# Altium PCB PCB1.PcbDoc (part 8 of 9)
Units mm, origin at the board's own origin, x right, y up, seen from the top; angles counter-clockwise.
Board outline 227 x 102 mm, 4 copper layers (Top Layer, MidLayer1, MidLayer2, Bottom Layer); 425 components, 426 nets, 1455 pads, 440 vias.
Unrouted connection lines stored in the file: 2.
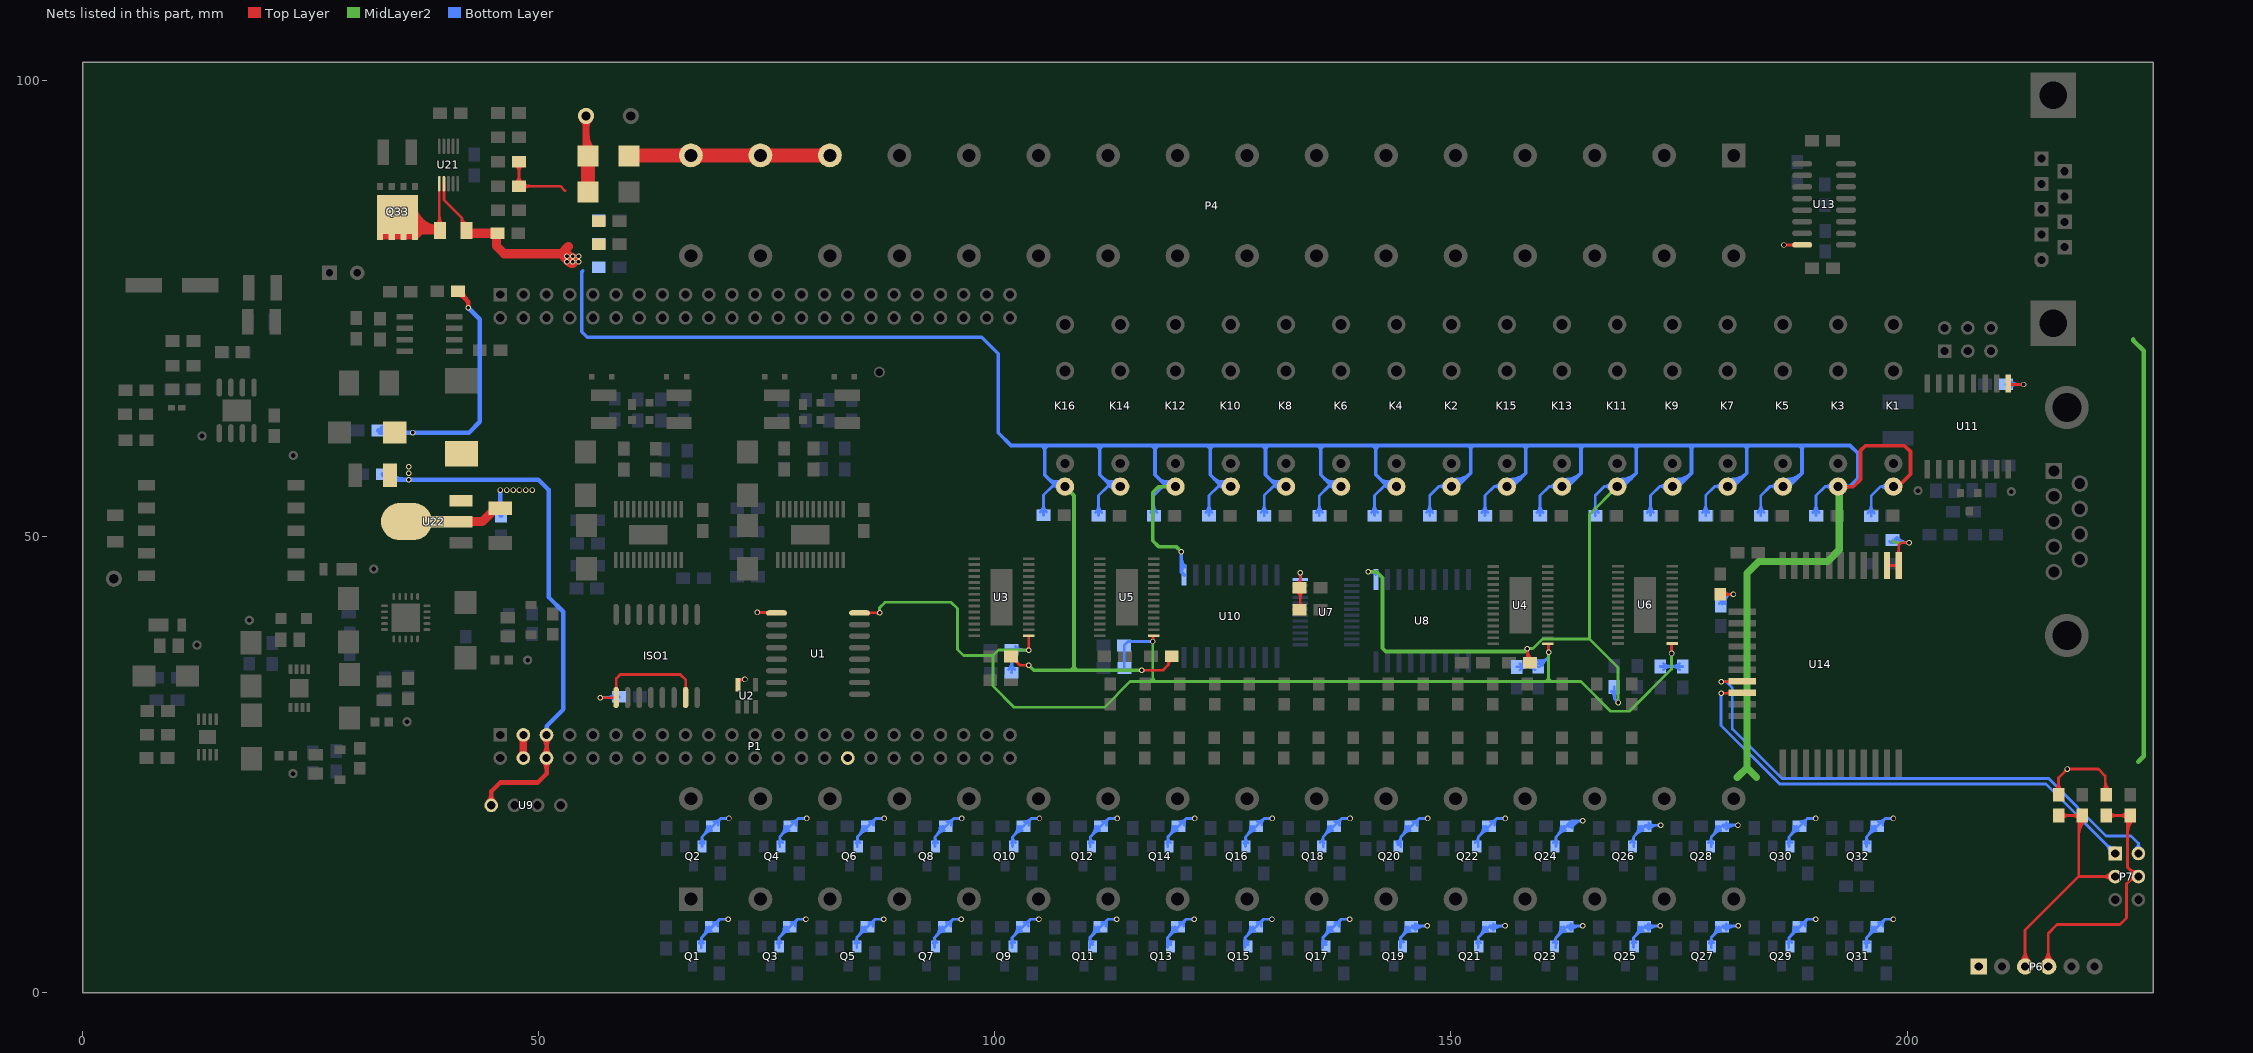
[diagram p10: the nets of this part, all layers, seen from the top]

## Via types
v1: diameter 0.6, hole 0.4, Top Layer to Bottom Layer, 427 vias
v2: diameter 0.5, hole 0.2, Top Layer to Bottom Layer, 9 vias
v3: diameter 0.66, hole 0.33, Top Layer to Bottom Layer, 4 vias

## Nets (pads, with @x,y where several pads share a name; then routed paths per layer and width w, separated by ;. In a path a pad name is that pad's centre, name@x,y a point inside that pad or via, vN(x,y) a via of type N, cw(c..) or ccw(c..) an arc to the next point about the centre after c; other vN are vias at no path point) (continued)
UART_RXD: C28.2 P6.3 P7.3 R126.2 | length 40.9
  Top Layer w0.3: P6.3@212.407,3.423 ccw(c211.146,4.684) 212.93,4.684 ccw(c214.714,4.684) P6.3@213.453,3.423 ; P6.3@212.62,3.21 ccw(c211.87,3.96) 212.93,3.96 ccw(c213.99,3.96) P6.3@213.24,3.21 ; P6.3@212.93,2.9 212.93,6.89 218.8,12.76 ; R126.2@216.6,19.444 C28.2@219.217,19.444 ; R126.2@216.943,19.101 cw(c217.771,18.273) 217.771,19.444 cw(c217.771,20.615) R126.2@216.943,19.787 ; 218.8,17.14 cw(c221.393,17.14) C28.2@219.56,18.974 ; 218.8,17.864 cw(c220.669,17.864) C28.2@219.347,19.186 ; 218.8,18.589 cw(c219.945,18.589) C28.2@219.135,19.398 ; C28.2@218.874,19.101 ccw(c218.046,18.273) 218.046,19.444 ccw(c218.046,20.615) C28.2@218.874,19.787 ; C28.2@219.15,19.75 218.8,19.4 218.8,12.76 ; P7.3@222.386,12.336 ccw(c221.361,11.311) 221.361,12.76 ccw(c221.361,14.209) P7.3@222.386,13.184 ; P7.3@222.81,12.76 218.8,12.76
UART_RXD1: P7.1 U14.19 | length 59.3
  Top Layer w0.3: v1(179.61,32.86) 182.2,32.86 U14.19@182.23,32.89 ; v1@179.716,32.754 cw(c179.972,32.498) 179.972,32.86 cw(c179.972,33.222) v1@179.716,32.966 ; 180.199,32.86 ccw(c180.199,33.486) U14.19@180.642,33.043 ; 180.402,32.86 cw(c180.402,32.521) U14.19@180.642,32.761
  Bottom Layer w0.3: v1@179.504,32.754 cw(c179.248,32.498) 179.61,32.498 cw(c179.972,32.498) v1@179.716,32.754 ; v1(179.61,32.86) 179.61,29.33 186.04,22.9 215.21,22.9 P7.1@222.81,15.3 ; P7.1@222.21,15.3 ccw(c220.761,15.3) 221.786,16.324 ccw(c222.81,17.349) P7.1@222.81,15.9
UART_TXD: C27.2 P6.4 P7.4 R125.2 | length 43.8
  Top Layer w0.3: P6.4@214.947,3.423 ccw(c213.686,4.684) 215.47,4.684 ccw(c217.254,4.684) P6.4@215.993,3.423 ; P6.4@215.16,3.21 ccw(c214.41,3.96) 215.47,3.96 ccw(c216.53,3.96) P6.4@215.78,3.21 ; P6.4@215.47,2.9 215.47,6.54 216.45,7.52 223.34,7.52 224.05,8.23 224.05,11.98 224.83,12.76 P7.4@225.35,12.76 ccw(c225.195,11.927) 224.596,12.526 ; R125.2@221.833,19.444 C27.2@224.45,19.444 224.15,19.144 224.15,13.77 P7.4@225.16,12.76 ; R125.2@222.176,19.101 cw(c223.004,18.273) 223.004,19.444 cw(c223.004,20.615) R125.2@222.176,19.787 ; C27.2@224.107,19.101 ccw(c223.279,18.273) 223.279,19.444 ccw(c223.279,20.615) C27.2@224.107,19.787 ; 224.15,17.422 cw(c226.345,17.422) C27.2@224.793,18.974 ; 224.15,18.146 cw(c225.621,18.146) C27.2@224.581,19.186 ; 224.193,12.123 cw(c225.069,11.247) P7.4@225.295,12.465 ; 224.245,13.675 ccw(c225.063,14.493) P7.4@225.252,13.352 ; 224.46,13.46 cw(c223.76,12.76) P7.4@224.75,12.76 ; 224.658,13.262 ccw(c225.18,13.785) P7.4@225.301,13.056
UART_TXD1: P7.2 U14.18 | length 62.5
  Top Layer w0.3: v1(179.61,34.13) 181.891,34.13 U14.18@181.933,34.172 ; v1@179.716,34.024 cw(c179.972,33.768) 179.972,34.13 cw(c179.972,34.492) v1@179.716,34.236 ; 180.199,34.13 ccw(c180.199,34.756) U14.18@180.642,34.313 ; 180.402,34.13 cw(c180.402,33.791) U14.18@180.642,34.031
  Bottom Layer w0.3: v1(179.61,34.13) 180.16,34.13 180.84,33.45 180.84,28.95 186.29,23.5 215.52,23.5 221.81,17.21 224.54,17.21 225.35,16.4 ; v1@179.716,34.024 cw(c179.972,33.768) 179.972,34.13 cw(c179.972,34.492) v1@179.716,34.236 ; P7.2@225.025,15.804 ccw(c224.642,16.4) 225.35,16.4 ; P7.2@225.35,15.3 225.35,16.4 ; P7.2@225.675,15.804 cw(c226.058,16.4) 225.35,16.4
V3_3D: C14.2 C15.2 C16.1 C48.1 C95.1 CA1.1 D51.1 ISO1.1 ISO1.7 P6.1 R124.2 R125.1 R126.1 R127.2 U1.1 U2.5 U7.24 U11.1 U13.16 U14.1 U14.2 U22.2 | length 141.8
  Top Layer w0.3: v1(56.75,32.36) 58.455,32.36 58.51,32.415 58.51,34.49 58.94,34.92 65.52,34.92 66.13,34.31 66.13,32.17 ISO1.7@66.21,32.09 ; v1@56.856,32.254 cw(c57.112,31.998) 57.112,32.36 cw(c57.112,32.722) v1@56.856,32.466 ; 58.05,32.36 ccw(c58.05,32.825) ISO1.1@58.379,32.496 ; ISO1.1@58.379,33.346 ccw(c58.063,33.662) 58.51,33.662 ; 58.51,33.542 ccw(c58.787,33.542) ISO1.1@58.591,33.346 ; ISO1.7@65.999,33.346 ccw(c65.683,33.662) 66.13,33.662 ; 66.13,33.542 ccw(c66.407,33.542) ISO1.7@66.211,33.346 ; U2.5@71.77,34.13 72.01,34.37 v1(72.61,34.37) ; U2.5@71.941,34.13 cw(c72.522,33.549) v1@72.522,34.37 ; v1@72.504,34.264 ccw(c72.248,34.008) 72.248,34.37 ccw(c72.248,34.732) v1@72.504,34.476 ; v1(73.97,41.71) 76.015,41.71 U1.1@76.07,41.655 ; v1@74.076,41.604 cw(c74.332,41.348) 74.332,41.71 cw(c74.332,42.072) v1@74.076,41.816 ; 74.725,41.71 cw(c74.725,41.16) U1.1@75.114,41.549 ; C14.2@133.127,44.067 cw(c132.275,43.215) 133.48,43.215 ; C14.2@133.127,44.753 ccw(c132.275,45.605) 133.48,45.605 ; v1@133.374,45.974 cw(c133.118,45.718) 133.48,45.718 cw(c133.842,45.718) v1@133.586,45.974 ; C15.2@133.414,42.02 133.48,42.086 v1(133.48,46.08) ; 133.48,43.263 cw(c134.617,43.263) C14.2@133.813,44.067 ; D51.1@179.517,43.717 179.534,43.7 v1(180.96,43.7) ; D51.1@179.86,43.374 cw(c180.647,42.587) 180.647,43.7 ; D51.1@179.86,44.06 ccw(c180.728,44.928) v1@180.728,43.7 ; v1@180.854,43.594 ccw(c180.598,43.338) 180.598,43.7 ccw(c180.598,44.062) v1@180.854,43.806 ; v1(186.5,81.99) 188.487,81.99 U13.16@188.5,82.003 ; v1@186.606,81.884 cw(c186.862,81.628) 186.862,81.99 cw(c186.862,82.352) v1@186.606,82.096 ; 187.306,81.99 ccw(c187.306,82.396) U13.16@187.594,82.109 ; 187.369,81.99 cw(c187.369,81.672) U13.16@187.594,81.897 ; U14.2@197.8,46.864 U14.1@199.07,46.864 199.07,49.06 199.37,49.36 v1(200.21,49.36) ; U14.2@197.941,46.723 cw(c198.283,46.381) 198.283,46.864 cw(c198.283,47.347) U14.2@197.941,47.005 ; U14.1@198.929,46.723 ccw(c198.587,46.381) 198.587,46.864 ccw(c198.587,47.347) U14.1@198.929,47.005 ; U14.1@198.929,48.155 ccw(c198.587,48.497) 199.07,48.497 ccw(c199.553,48.497) U14.1@199.211,48.155 ; v1@200.104,49.254 ccw(c199.848,48.998) 199.848,49.36 ccw(c199.848,49.722) v1@200.104,49.466 ; U11.1@211.085,66.81 211.195,66.7 v1(212.76,66.7) ; U11.1@211.191,66.916 ccw(c211.713,67.438) 211.713,66.7 ; v1@212.654,66.594 ccw(c212.398,66.338) 212.398,66.7 ccw(c212.398,67.062) v1@212.654,66.806 ; R126.1@216.257,22.2 ccw(c215.429,23.028) 216.6,23.028 ccw(c217.771,23.028) R126.1@216.943,22.2 ; R126.1@216.6,21.73 216.6,23.58 v1(217.57,24.55) 220.96,24.55 221.71,23.8 221.71,21.853 R125.1@221.833,21.73 ; v1@217.42,24.55 cw(c217.058,24.55) 217.314,24.294 cw(c217.57,24.038) v1@217.57,24.4 ; v1@217.676,24.444 cw(c217.932,24.188) 217.932,24.55 cw(c217.932,24.912) v1@217.676,24.656 ; R125.1@221.49,22.2 ccw(c220.96,22.73) 221.71,22.73 ; 221.71,22.601 ccw(c222.578,22.601) R125.1@221.964,21.988 ; 221.71,23.326 ccw(c223.302,23.326) R125.1@222.176,22.2
  Top Layer w0.5: CA1.1@45.785,53.135 CA1.1@45.8,53.15
  Top Layer w1: U22.2@40.214,51.67 43.8,51.67 CA1.1@45.5,53.37
  MidLayer2 w0.3: 198.399,49.568 198.607,49.36 v1(200.21,49.36)
  MidLayer2 w0.5: 224.783,71.63 224.783,71.522 225.918,70.387 225.918,25.936 225.319,25.337
  Bottom Layer w0.3: v1(56.75,32.36) 58.73,32.36 C48.1@58.82,32.45 ; v1@56.856,32.254 cw(c57.112,31.998) 57.112,32.36 cw(c57.112,32.722) v1@56.856,32.466 ; 57.305,32.36 ccw(c57.305,33.838) C48.1@58.35,32.793 ; 57.739,32.36 cw(c57.739,31.496) C48.1@58.35,32.107 ; 58.029,32.36 ccw(c58.029,33.114) C48.1@58.562,32.581 ; v1@133.374,45.974 cw(c133.118,45.718) 133.48,45.718 cw(c133.842,45.718) v1@133.586,45.974 ; U7.24@133.48,45.326 v1(133.48,46.08) ; R127.2@179.42,42.69 180.43,43.7 ; R127.2@179.55,43.108 ccw(c179.55,43.803) 180.042,43.312 ; R127.2@179.735,42.635 cw(c180.507,42.683) R127.2@179.96,43.23 ; R127.2@180.034,42.653 cw(c181.392,42.738) 180.43,43.7 ; v1@180.854,43.594 ccw(c180.598,43.338) 180.598,43.7 ccw(c180.598,44.062) v1@180.854,43.806 ; v1(180.96,43.7) 180.43,43.7 ; R124.2@198.08,49.49 198.21,49.36 v1(200.21,49.36) cw(c200.21,51.12) R124.2@198.88,49.968 ; R124.2@198.653,49.771 ccw(c199.553,50.551) 199.553,49.36 ; v1@200.104,49.254 ccw(c199.848,48.998) 199.848,49.36 ccw(c199.848,49.722) v1@200.104,49.466 ; C16.1@210.84,66.74 210.88,66.7 v1(212.76,66.7) ; C16.1@211.31,66.397 cw(c212.041,65.666) 212.041,66.7 ; C16.1@211.31,67.083 ccw(c212.234,68.007) 212.234,66.7 ; v1@212.654,66.594 ccw(c212.398,66.338) 212.398,66.7 ccw(c212.398,67.062) v1@212.654,66.806
  Bottom Layer w0.5: C95.1@45.598,52.729 ccw(c45.11,53.217) 45.8,53.217 ; 45.8,53.555 ccw(c46.968,53.555) C95.1@46.142,52.729 ; v1@45.8,55.12 45.8,52.4 C95.1@45.87,52.33
  other v1: 45.8,55.13 46.498,55.13 47.196,55.13 47.894,55.13 48.592,55.13 49.29,55.13
V5_0VOP: C6.2 C7.2 C8.2 C9.2 C10.2 C11.2 C12.2 C13.2 U1.16 U3.15 U4.15 U5.15 U6.15 | length 161.5
  Top Layer w0.3: U1.16@85.17,41.655 85.185,41.67 v1(87.37,41.67) ; U1.16@86.126,41.549 cw(c86.418,41.257) 86.418,41.67 ; U1.16@86.126,41.761 ccw(c86.346,41.981) 86.346,41.67 ; v1@87.264,41.564 ccw(c87.008,41.308) 87.008,41.67 ccw(c87.008,42.032) v1@87.264,41.776 ; v1@103.604,37.686 ccw(c103.348,37.942) 103.71,37.942 ccw(c104.072,37.942) v1@103.816,37.686 ; U3.15@103.702,39.155 103.71,39.147 v1(103.71,37.58) ; v1@117.214,38.636 ccw(c116.958,38.892) 117.32,38.892 ccw(c117.682,38.892) v1@117.426,38.636 ; v1(117.32,38.53) U5.15@117.32,39.033 ; 117.32,38.855 cw(c117.742,38.855) U5.15@117.443,39.153 ; v1(160.7,37.35) U4.15@160.7,38.133 ; v1@174.074,37.326 ccw(c173.818,37.582) 174.18,37.582 ccw(c174.542,37.582) v1@174.286,37.326 ; v1(174.18,37.22) 174.18,38.243 U6.15@174.252,38.315 ; 174.18,38.136 cw(c174.431,38.136) U6.15@174.252,38.315
  MidLayer2 w0.3: v1(87.37,41.67) 87.37,42.226 87.969,42.825 95.224,42.825 95.911,42.138 95.911,37.672 96.579,37.004 99.806,37.004 ; v1(103.71,37.58) 103.703,37.587 100.389,37.587 99.806,37.004 ; 117,34.157 117.317,34.474 ; v1@117.317,38.527 117.317,34.474 ; 117.634,34.157 117.317,34.474 ; 160.36,34.14 160.7,34.48 ; v1(160.7,37.35) 160.7,34.48 ; 161.04,34.14 160.7,34.48 ; v1(174.18,37.22) 174.18,35.493 169.573,30.886 167.502,30.886 164.248,34.14 114.839,34.14 112.012,31.313 102.131,31.313 99.806,33.638 99.806,37.004
  Bottom Layer w0.3: C7.2@101.463,37.287 cw(c100.514,36.338) 101.856,36.338 ; C6.2@101.493,35.463 ccw(c100.617,36.339) 101.856,36.339 ; C7.2@101.806,37.63 C7.2@101.856,37.58 ; C6.2@101.836,35.12 101.856,35.14 C7.2@101.856,37.58 ; 101.856,36.243 ccw(c102.959,36.243) C6.2@102.179,35.463 ; 101.856,36.58 cw(c102.856,36.58) C7.2@102.149,37.287 ; C7.2@102.276,37.287 cw(c102.983,36.58) 102.983,37.58 ; C7.2@102.276,37.973 ccw(c103.225,38.922) 103.225,37.58 ; v1@103.604,37.474 ccw(c103.348,37.218) 103.348,37.58 ccw(c103.348,37.942) v1@103.604,37.686 ; v1(103.71,37.58) C7.2@101.856,37.58 ; C10.2@114.21,35.62 114.18,35.65 C11.2@114.18,38.09 114.62,38.53 v1(117.32,38.53) ; C8.2@157.227,35.753 159.667,35.753 160.7,36.786 ; C8.2@157.57,35.41 cw(c158.398,34.582) 158.398,35.753 cw(c158.398,36.924) C8.2@157.57,36.096 ; 158.323,35.753 ccw(c158.323,37.003) C9.2@159.207,36.119 ; 158.435,35.753 cw(c158.435,34.661) C9.2@159.207,35.433 ; C9.2@159.567,36.087 ccw(c159.645,36.936) 160.247,36.333 ; C9.2@159.594,36.386 ccw(c159.72,37.766) 160.7,36.786 ; C9.2@160.035,35.903 cw(c160.561,35.903) 160.189,36.275 ; v1@160.594,37.244 cw(c160.338,36.988) 160.7,36.988 cw(c161.062,36.988) v1@160.806,37.244 ; v1(160.7,37.35) 160.7,36.786 ; C13.2@172.947,35.776 C12.2@175.397,35.776 ; C13.2@173.29,35.433 cw(c174.118,34.605) 174.118,35.776 cw(c174.118,36.947) C13.2@173.29,36.119 ; 173.98,35.776 174.18,35.976 ; v1@174.074,37.114 cw(c173.818,36.858) 174.18,36.858 cw(c174.542,36.858) v1@174.286,37.114 ; v1(174.18,37.22) 174.18,35.976 ; 174.38,35.776 174.18,35.976 ; C12.2@175.054,35.433 ccw(c174.226,34.605) 174.226,35.776 ccw(c174.226,36.947) C12.2@175.054,36.119
V24_IN: D1.1 P4.27 P4.29 P4.31 | length 32.5
  Top Layer w1.5: D1.1@59.91,91.77 59.95,91.81 P4.27@81.927,91.81 ; P4.31@66.298,91.421 ccw(c65.359,90.482) 65.359,91.81 ccw(c65.359,93.138) P4.31@66.298,92.199 ; P4.31@67.076,91.421 cw(c68.015,90.482) 68.015,91.81 cw(c68.015,93.138) P4.31@67.076,92.199 ; P4.29@73.918,91.421 ccw(c72.979,90.482) 72.979,91.81 ccw(c72.979,93.138) P4.29@73.918,92.199 ; P4.29@74.696,91.421 cw(c75.635,90.482) 75.635,91.81 cw(c75.635,93.138) P4.29@74.696,92.199 ; P4.27@81.538,91.421 ccw(c80.599,90.482) 80.599,91.81 ccw(c80.599,93.138) P4.27@81.538,92.199
VCC24V: C1.2 C2.2 C3.2 C4.2 C5.2 C87.1 D1.2 D2.2 K1.4 K2.4 K3.4 K4.4 K5.4 K6.4 K7.4 K8.4 K9.4 K10.4 K11.4 K12.4 K13.4 K14.4 K15.4 K16.4 Q1.2 Q2.2 Q3.2 Q4.2 Q5.2 Q6.2 Q7.2 Q8.2 Q9.2 Q10.2 Q11.2 Q12.2 Q13.2 Q14.2 Q15.2 Q16.2 Q17.2 Q18.2 Q19.2 Q20.2 Q21.2 Q22.2 Q23.2 Q24.2 Q25.2 Q26.2 Q27.2 Q28.2 Q29.2 Q30.2 Q31.2 Q32.2 R1.1 R2.1 R5.1 R6.1 R9.1 R10.1 R11.1 R12.1 R13.1 R14.1 R15.1 R16.1 R33.1 R34.1 R35.1 R36.1 R37.1 R38.1 R39.1 R40.1 R57.1 R58.1 R59.1 R60.1 R61.1 R62.1 R63.1 R64.1 R81.1 R82.1 R83.1 R84.1 R85.1 R86.1 R87.1 R88.1 R105.1 R106.1 R107.1 R108.1 R109.1 R110.2 R111.1 R112.2 R113.1 R114.2 R115.1 R116.2 R117.1 R118.2 R119.1 R120.2 R149.1 R150.2 R151.2 TP11.1 U8.10 U10.10 U21.2 | length 1023.1
  Top Layer w0.3: U21.2@39.614,88.71 39.614,86.936 41.58,84.97 ; R149.1@41.58,83.7 41.58,84.97 ; R149.1@41.58,84.294 ccw(c42.122,84.294) R149.1@42.058,83.756 ; 41.58,84.632 ccw(c42.163,84.632) R149.1@42.094,84.054 ; R149.1@42.129,84.351 cw(c42.203,84.97) 41.58,84.97 ; R151.2@47.497,88.783 ccw(c46.669,89.611) 47.84,89.611 ccw(c49.011,89.611) R151.2@48.183,88.783 ; R150.2@47.497,90.777 cw(c46.669,89.949) 47.84,89.949 cw(c49.011,89.949) R150.2@48.183,90.777 ; R150.2@47.84,91.12 R151.2@47.84,88.44 52.37,88.44 52.88,87.93 ; R151.2@48.31,88.097 cw(c49.138,87.269) 49.138,88.44 cw(c49.138,89.611) R151.2@48.31,88.783 ; R1.1@101.79,36.88 102.74,35.93 v1(103.71,35.93) ; R1.1@101.917,36.395 cw(c101.917,35.531) 102.528,36.142 ; R1.1@102.398,36.816 ccw(c103.37,36.687) 102.676,35.994 ; v1@103.604,35.824 ccw(c103.348,35.568) 103.348,35.93 ccw(c103.348,36.292) v1@103.604,36.036 ; v1(116.09,35.37) 118.41,35.37 119.03,35.99 R5.1@119.03,36.57 ; v1@116.196,35.264 cw(c116.452,35.008) 116.452,35.37 cw(c116.452,35.732) v1@116.196,35.476 ; R5.1@118.92,36.587 cw(c118.655,36.322) R5.1@119.03,36.322 ; 119.03,35.962 cw(c119.557,35.962) R5.1@119.404,36.466 ; R2.1@158.18,36.543 ccw(c157.721,37.002) 158.37,37.002 ; v1@158.264,37.644 cw(c158.008,37.388) 158.37,37.388 cw(c158.732,37.388) v1@158.476,37.644 ; 158.37,37.016 ccw(c159.339,37.016) R2.1@158.654,36.331 ; v1@158.37,37.74 ccw(c160.063,37.74) R2.1@158.866,36.543 ; v1(158.37,37.75) 158.37,36.48 R2.1@158.65,36.2
  Top Layer w0.4: K3.4@192.437,55.5 194.085,55.5 194.883,56.298 194.883,59.455 195.395,59.967 199.754,59.967 200.366,59.355 200.366,56.873 198.993,55.5 K1.4@198.49,55.5
  Top Layer w0.8: TP11.1@54.844,95.794 cw(c54.009,94.959) 55.19,94.959 cw(c56.371,94.959) TP11.1@55.536,95.794 ; D1.2@54.88,92.3 ccw(c54.13,93.05) 55.19,93.05 ; 55.19,94.112 ccw(c57.752,94.112) D1.2@55.94,92.3 ; TP11.1@55.19,96.14 55.19,91.91 D1.2@55.23,91.87
  Top Layer w1: R149.1@42.11,83.36 42.19,83.28 C87.1@45.474,83.28 ; C87.1@45.37,83.28 45.37,81.89 46.23,81.03 52.46,81.03 ; 52.703,80.787 ccw(c53.413,81.498) v1@53.815,80.577 ; 52.81,80.68 ccw(c53.1,80.97) v1@53.1,80.56 ; v1@52.902,80.729 cw(c54.161,80.929) 53.26,81.83 52.46,81.03 ; v1@53.26,80.23 52.46,81.03 ; 53.402,80.088 ccw(c53.735,80.421) v1@53.735,79.95 ; 52.931,81.03 cw(c52.931,80.591) 53.241,80.901 ccw(c52.931,80.591) 52.931,81.03
  Top Layer w1.5: D2.2@55.41,87.79 D1.2@55.41,91.77
  MidLayer2 w0.3: v1(158.37,37.75) 159.001,37.75 160.043,38.792 165.196,38.792 ; K11.4@168.227,55.5 165.196,52.469 165.196,38.792 ; v1(168.32,31.84) 168.32,35.668 165.196,38.792
  MidLayer2 w0.4: v1(103.71,35.93) 104.27,35.37 v1(116.09,35.37) ; K16.4@107.7,55.5 108.678,54.522 108.678,35.706 ; 108.333,35.361 108.678,35.706 ; 109.023,35.361 108.678,35.706 ; K12.4@119.805,55.5 117.95,55.5 117.3,54.85 117.3,49.581 117.951,48.93 119.86,48.93 v1(120.42,48.37) ; v1(140.92,46.19) 141.82,46.19 142.5,45.51 142.5,37.776 142.836,37.44 158.06,37.44 v1(158.37,37.75)
  MidLayer2 w0.8: 181.39,23.64 182.44,24.69 ; 183.49,23.64 182.44,24.69 ; K3.4@192.574,55.35 192.574,48.58 191.298,47.304 183.723,47.304 182.44,46.021 182.44,24.69
  Bottom Layer w0.3: Q1.2@67.587,5.489 ccw(c67.037,6.06) 67.83,6.06 ; Q2.2@67.663,16.444 ccw(c67.065,17.042) 67.91,17.042 ccw(c68.755,17.042) Q2.2@68.157,16.444 ; Q1.2@67.83,4.997 67.83,6.06 ; Q2.2@67.91,16.047 67.91,17.11 69.93,19.13 ; 67.965,6.195 ccw(c66.92,7.24) R9.1@68.398,7.24 ; 68.045,17.245 ccw(c67,18.29) R10.1@68.478,18.29 ; Q1.2@68.073,5.489 cw(c68.623,6.06) 67.83,6.06 ; 68.272,6.502 cw(c68.883,5.891) R9.1@68.883,6.755 ; 68.352,17.552 cw(c68.963,16.941) R10.1@68.963,17.805 ; R9.1@68.477,6.707 ccw(c67.945,7.24) R9.1@68.698,7.24 ; R10.1@68.557,17.757 ccw(c68.025,18.29) R10.1@68.778,18.29 ; R9.1@69.137,7.725 ccw(c69.137,8.589) 69.748,7.978 ; R10.1@69.217,18.775 ccw(c69.217,19.639) 69.828,19.028 ; R9.1@69.614,7.326 cw(c70.452,7.478) 69.85,8.08 ; R10.1@69.694,18.376 cw(c70.532,18.528) 69.93,19.13 ; v1@70.674,7.974 ccw(c70.418,7.718) 70.418,8.08 ccw(c70.418,8.442) v1@70.674,8.186 ; v1@70.754,19.024 ccw(c70.498,18.768) 70.498,19.13 ccw(c70.498,19.492) v1@70.754,19.236 ; v1(70.78,8.08) 69.85,8.08 ; v1(70.86,19.13) 69.93,19.13 ; Q3.2@76.123,5.484 ccw(c75.586,6.021) 76.345,6.021 ; Q4.2@76.323,16.444 ccw(c76.089,16.678) Q4.2@76.419,16.678 ; Q3.2@76.345,4.997 76.345,6.06 ; Q4.2@76.419,16.047 76.419,17.11 ; 76.48,6.195 ccw(c75.435,7.24) R11.1@76.913,7.24 ; 76.555,17.245 ccw(c75.51,18.29) R12.1@76.987,18.29 ; Q3.2@76.6,5.501 cw(c77.085,6.06) 76.345,6.06 ; Q4.2@76.758,16.492 cw(c77.152,17.11) 76.419,17.11 ; 76.787,6.502 cw(c77.398,5.891) R11.1@77.398,6.755 ; 76.861,17.552 cw(c77.472,16.941) R12.1@77.472,17.805 ; R11.1@76.992,6.707 ccw(c76.459,7.24) R11.1@77.213,7.24 ; R12.1@77.067,17.757 ccw(c76.534,18.29) R12.1@77.287,18.29 ; R11.1@77.652,7.725 ccw(c77.652,8.589) 78.263,7.978 ; R12.1@77.726,18.775 ccw(c77.726,19.639) 78.337,19.028 ; R11.1@78.129,7.326 cw(c78.967,7.478) 78.365,8.08 ; R12.1@78.204,18.376 cw(c79.041,18.528) 78.439,19.13 ; v1@79.189,7.974 ccw(c78.933,7.718) 78.933,8.08 ccw(c78.933,8.442) v1@79.189,8.186 ; v1@79.263,19.024 ccw(c79.007,18.768) 79.007,19.13 ccw(c79.007,19.492) v1@79.263,19.236 ; v1(79.295,8.08) 78.365,8.08 ; v1(79.369,19.13) 78.439,19.13 ; Q5.2@84.633,5.484 ccw(c84.085,6.032) 84.859,6.032 ; Q6.2@84.783,16.444 ccw(c84.43,16.797) 84.929,16.797 ; Q5.2@84.859,4.997 84.859,6.06 ; Q6.2@84.929,16.047 84.929,17.11 ; 84.995,6.195 ccw(c83.95,7.24) R13.1@85.427,7.24 ; 85.064,17.245 ccw(c84.019,18.29) R14.1@85.497,18.29 ; Q5.2@85.112,5.499 cw(c85.609,6.06) 84.859,6.06 ; Q6.2@85.243,16.475 cw(c85.728,17.11) 84.929,17.11 ; 85.301,6.502 cw(c85.912,5.891) R13.1@85.912,6.755 ; 85.371,17.552 cw(c85.982,16.941) R14.1@85.982,17.805 ; R13.1@85.507,6.707 ccw(c84.974,7.24) R13.1@85.727,7.24 ; R14.1@85.576,17.757 ccw(c85.043,18.29) R14.1@85.797,18.29 ; R13.1@86.166,7.725 ccw(c86.166,8.589) 86.777,7.978 ; R14.1@86.236,18.775 ccw(c86.236,19.639) 86.847,19.028 ; R13.1@86.644,7.326 cw(c87.481,7.478) 86.879,8.08 ; R14.1@86.713,18.376 cw(c87.551,18.528) 86.949,19.13 ; v1@87.703,7.974 ccw(c87.447,7.718) 87.447,8.08 ccw(c87.447,8.442) v1@87.703,8.186 ; v1@87.773,19.024 ccw(c87.517,18.768) 87.517,19.13 ccw(c87.517,19.492) v1@87.773,19.236 ; v1(87.809,8.08) 86.879,8.08 ; v1(87.879,19.13) 86.949,19.13 ; Q7.2@93.233,5.484 ccw(c92.891,5.826) 93.374,5.826 ; Q8.2@93.253,16.444 ccw(c92.805,16.892) 93.438,16.892 ; Q7.2@93.374,4.997 93.374,6.06 ; Q8.2@93.438,16.047 93.438,17.11 ; 93.509,6.195 ccw(c92.464,7.24) R15.1@93.942,7.24 ; 93.573,17.245 ccw(c92.528,18.29) R16.1@94.006,18.29 ; Q7.2@93.666,5.534 cw(c93.995,6.06) 93.374,6.06 ; Q8.2@93.732,16.459 cw(c94.306,17.11) 93.438,17.11 ; 93.816,6.502 cw(c94.427,5.891) R15.1@94.427,6.755 ; 93.88,17.552 cw(c94.491,16.941) R16.1@94.491,17.805 ; R15.1@94.021,6.707 ccw(c93.489,7.24) R15.1@94.242,7.24 ; R16.1@94.085,17.757 ccw(c93.553,18.29) R16.1@94.306,18.29 ; R15.1@94.681,7.725 ccw(c94.681,8.589) 95.292,7.978 ; R16.1@94.745,18.775 ccw(c94.745,19.639) 95.356,19.028 ; R15.1@95.158,7.326 cw(c95.996,7.478) 95.394,8.08 ; R16.1@95.222,18.376 cw(c96.06,18.528) 95.458,19.13 ; v1@96.218,7.974 ccw(c95.962,7.718) 95.962,8.08 ccw(c95.962,8.442) v1@96.218,8.186 ; v1@96.282,19.024 ccw(c96.026,18.768) 96.026,19.13 ccw(c96.026,19.492) v1@96.282,19.236 ; v1(96.324,8.08) 95.394,8.08 93.374,6.06 ; v1(96.388,19.13) 95.458,19.13 ; Q9.2@101.753,5.484 ccw(c101.424,5.813) 101.889,5.813 ; Q10.2@101.833,16.444 ccw(c101.555,16.721) 101.947,16.721 ; Q9.2@101.889,4.997 101.889,6.06 ; Q10.2@101.947,16.047 101.947,17.11 ; 102.024,6.195 ccw(c100.979,7.24) R33.1@102.457,7.24 ; 102.083,17.245 ccw(c101.038,18.29) R34.1@102.515,18.29 ; Q9.2@102.183,5.535 cw(c102.504,6.06) 101.889,6.06 ; Q10.2@102.277,16.486 cw(c102.702,17.11) 101.947,17.11 ; 102.331,6.502 cw(c102.942,5.891) R33.1@102.942,6.755 ; 102.389,17.552 cw(c103,16.941) R34.1@103,17.805 ; R33.1@102.536,6.707 ccw(c102.003,7.24) R33.1@102.757,7.24 ; R34.1@102.595,17.757 ccw(c102.062,18.29) R34.1@102.815,18.29 ; R33.1@103.196,7.725 ccw(c103.196,8.589) 103.807,7.978 ; R34.1@103.254,18.775 ccw(c103.254,19.639) 103.865,19.028 ; R33.1@103.673,7.326 cw(c104.511,7.478) 103.909,8.08 ; R34.1@103.732,18.376 cw(c104.569,18.528) 103.967,19.13 ; v1@104.733,7.974 ccw(c104.477,7.718) 104.477,8.08 ccw(c104.477,8.442) v1@104.733,8.186 ; v1@104.791,19.024 ccw(c104.535,18.768) 104.535,19.13 ccw(c104.535,19.492) v1@104.791,19.236 ; v1(104.839,8.08) 103.909,8.08 ; v1(104.897,19.13) 103.967,19.13 ; R120.2@104.984,52.72 ccw(c104.156,53.548) 105.327,53.548 ccw(c106.498,53.548) R120.2@105.67,52.72 ; R120.2@105.327,52.377 105.327,54.567 106.357,55.597 ; K16.4@106.899,55.215 ccw(c106.357,55.022) 106.357,55.597 ; K16.4@106.975,55.943 cw(c106.357,56.321) 106.357,55.597 ; K16.4@107.757,55.597 106.357,55.597 ; Q12.2@110.353,16.444 ccw(c110.101,16.696) Q12.2@110.457,16.696 ; Q11.2@110.403,4.997 110.403,6.06 ; Q11.2@110.403,5.684 ccw(c110.812,5.684) Q11.2@110.721,5.286 ; Q12.2@110.457,16.047 110.457,17.11 ; 110.539,6.195 ccw(c109.494,7.24) R35.1@110.971,7.24 ; 110.592,17.245 ccw(c109.547,18.29) R36.1@111.025,18.29 ; Q11.2@110.788,5.578 cw(c110.898,6.06) 110.403,6.06 ; Q12.2@110.792,16.49 cw(c111.198,17.11) 110.457,17.11 ; 110.845,6.502 cw(c111.456,5.891) R35.1@111.456,6.755 ; 110.899,17.552 cw(c111.51,16.941) R36.1@111.51,17.805 ; R118.2@111.033,52.67 ccw(c110.205,53.498) 111.376,53.498 ccw(c112.547,53.498) R118.2@111.719,52.67 ; R35.1@111.051,6.707 ccw(c110.518,7.24) R35.1@111.271,7.24 ; R36.1@111.104,17.757 ccw(c110.571,18.29) R36.1@111.325,18.29 ; R118.2@111.376,52.327 111.376,54.517 112.406,55.547 ; R35.1@111.71,7.725 ccw(c111.71,8.589) 112.321,7.978 ; R36.1@111.764,18.775 ccw(c111.764,19.639) 112.375,19.028 ; R35.1@112.188,7.326 cw(c113.025,7.478) 112.423,8.08 ; R36.1@112.241,18.376 cw(c113.079,18.528) 112.477,19.13 ; K14.4@112.968,55.173 ccw(c112.406,54.938) 112.406,55.547 ; K14.4@113.005,55.904 cw(c112.406,56.228) 112.406,55.547 ; v1@113.247,7.974 ccw(c112.991,7.718) 112.991,8.08 ccw(c112.991,8.442) v1@113.247,8.186 ; v1@113.301,19.024 ccw(c113.045,18.768) 113.045,19.13 ccw(c113.045,19.492) v1@113.301,19.236 ; v1(113.353,8.08) 112.423,8.08 ; v1(113.407,19.13) 112.477,19.13 ; K14.4@113.806,55.547 112.406,55.547 ; R116.2@117.082,52.67 ccw(c116.254,53.498) 117.425,53.498 ccw(c118.596,53.498) R116.2@117.768,52.67 ; R116.2@117.425,52.327 117.425,54.517 118.455,55.547 ; Q14.2@118.843,16.444 ccw(c118.544,16.742) 118.966,16.742 ; Q13.2@118.918,4.997 118.918,6.06 ; Q13.2@118.918,5.708 ccw(c119.345,5.708) Q13.2@119.278,5.286 ; Q14.2@118.966,16.047 118.966,17.11 ; K12.4@119.022,55.17 ccw(c118.455,54.932) 118.455,55.547 ; 119.053,6.195 ccw(c118.008,7.24) R37.1@119.486,7.24 ; K12.4@119.059,55.906 cw(c118.455,56.234) 118.455,55.547 ; 119.101,17.245 ccw(c118.056,18.29) R38.1@119.534,18.29 ; Q14.2@119.291,16.483 cw(c119.733,17.11) 118.966,17.11 ; Q13.2@119.325,5.582 cw(c119.402,6.06) 118.918,6.06 ; 119.36,6.502 cw(c119.971,5.891) R37.1@119.971,6.755 ; 119.408,17.552 cw(c120.019,16.941) R38.1@120.019,17.805 ; R37.1@119.565,6.707 ccw(c119.033,7.24) R37.1@119.786,7.24 ; R38.1@119.613,17.757 ccw(c119.081,18.29) R38.1@119.834,18.29 ; K12.4@119.855,55.547 118.455,55.547 ; R37.1@120.225,7.725 ccw(c120.225,8.589) 120.836,7.978 ; R38.1@120.273,18.775 ccw(c120.273,19.639) 120.884,19.028 ; R37.1@120.702,7.326 cw(c121.54,7.478) 120.938,8.08 ; R38.1@120.75,18.376 cw(c121.588,18.528) 120.986,19.13 ; v1@121.762,7.974 ccw(c121.506,7.718) 121.506,8.08 ccw(c121.506,8.442) v1@121.762,8.186 ; v1@121.81,19.024 ccw(c121.554,18.768) 121.554,19.13 ccw(c121.554,19.492) v1@121.81,19.236 ; v1(121.868,8.08) 120.938,8.08 ; v1(121.916,19.13) 120.986,19.13 ; R114.2@123.131,52.67 ccw(c122.303,53.498) 123.474,53.498 ccw(c124.645,53.498) R114.2@123.817,52.67 ; R114.2@123.474,52.327 123.474,54.517 124.504,55.547 ; K10.4@125.075,55.168 ccw(c124.504,54.926) 124.504,55.547 ; K10.4@125.112,55.908 cw(c124.504,56.24) 124.504,55.547 ; K10.4@125.904,55.547 124.504,55.547 ; Q16.2@127.293,16.444 ccw(c126.851,16.886) 127.475,16.886 ; Q15.2@127.433,4.997 127.433,6.06 ; Q15.2@127.433,5.678 ccw(c127.837,5.678) Q15.2@127.742,5.285 ; Q16.2@127.475,16.047 127.475,17.11 ; 127.568,6.195 ccw(c126.523,7.24) R39.1@128.001,7.24 ; 127.611,17.245 ccw(c126.566,18.29) R40.1@128.043,18.29 ; Q16.2@127.77,16.46 cw(c128.338,17.11) 127.475,17.11 ; Q15.2@127.813,5.577 cw(c127.93,6.06) 127.433,6.06 ; 127.875,6.502 cw(c128.486,5.891) R39.1@128.486,6.755 ; 127.917,17.552 cw(c128.528,16.941) R40.1@128.528,17.805 ; R39.1@128.08,6.707 ccw(c127.547,7.24) R39.1@128.301,7.24 ; R40.1@128.123,17.757 ccw(c127.59,18.29) R40.1@128.343,18.29 ; R39.1@128.74,7.725 ccw(c128.74,8.589) 129.351,7.978 ; R40.1@128.782,18.775 ccw(c128.782,19.639) 129.393,19.028 ; R112.2@129.18,52.67 ccw(c128.352,53.498) 129.523,53.498 ccw(c130.693,53.498) R112.2@129.866,52.67 ; R39.1@129.217,7.326 cw(c130.055,7.478) 129.453,8.08 ; R40.1@129.26,18.376 cw(c130.097,18.528) 129.495,19.13 ; R112.2@129.523,52.327 129.523,54.517 130.553,55.547 K8.4@131.953,55.547 ; v1@130.277,7.974 ccw(c130.021,7.718) 130.021,8.08 ccw(c130.021,8.442) v1@130.277,8.186 ; v1@130.319,19.024 ccw(c130.063,18.768) 130.063,19.13 ccw(c130.063,19.492) v1@130.319,19.236 ; v1(130.383,8.08) 129.453,8.08 ; v1(130.425,19.13) 129.495,19.13 ; K8.4@131.129,55.166 ccw(c130.553,54.921) 130.553,55.547 ccw(c130.553,56.247) K8.4@131.166,55.91 ; R110.2@135.229,52.67 ccw(c134.401,53.498) 135.571,53.498 ccw(c136.742,53.498) R110.2@135.914,52.67 ; R110.2@135.571,52.327 135.571,54.517 136.601,55.547 ; Q18.2@135.649,16.49 ccw(c135.244,17.11) 135.985,17.11 ; Q17.2@135.947,4.997 135.947,6.06 ; Q17.2@135.947,5.709 ccw(c136.375,5.709) Q17.2@136.308,5.286 ; Q18.2@135.985,16.047 135.985,17.11 ; Q18.2@135.985,16.693 ccw(c136.336,16.693) Q18.2@136.087,16.444 ; 136.083,6.195 ccw(c135.038,7.24) R57.1@136.515,7.24 ; 136.12,17.245 ccw(c135.075,18.29) R58.1@136.553,18.29 ; Q17.2@136.355,5.582 cw(c136.431,6.06) 135.947,6.06 ; 136.389,6.502 cw(c137,5.891) R57.1@137,6.755 ; 136.427,17.552 cw(c137.038,16.941) R58.1@137.038,17.805 ; R57.1@136.595,6.707 ccw(c136.062,7.24) R57.1@136.815,7.24 ; R58.1@136.632,17.757 ccw(c136.099,18.29) R58.1@136.853,18.29 ; K6.4@137.182,55.164 ccw(c136.602,54.915) 136.602,55.547 ; K6.4@137.22,55.911 cw(c136.602,56.253) 136.602,55.547 ; R57.1@137.254,7.725 ccw(c137.254,8.589) 137.865,7.978 ; R58.1@137.292,18.775 ccw(c137.292,19.639) 137.903,19.028 ; R57.1@137.732,7.326 cw(c138.569,7.478) 137.967,8.08 ; R58.1@137.769,18.376 cw(c138.607,18.528) 138.005,19.13 ; K6.4@138.001,55.547 136.601,55.547 ; v1@138.791,7.974 ccw(c138.535,7.718) 138.535,8.08 ccw(c138.535,8.442) v1@138.791,8.186 ; v1@138.829,19.024 ccw(c138.573,18.768) 138.573,19.13 ccw(c138.573,19.492) v1@138.829,19.236 ; v1(138.897,8.08) 137.967,8.08 ; v1(138.935,19.13) 138.005,19.13 ; R108.1@141.277,52.67 ccw(c140.449,53.498) 141.62,53.498 ccw(c142.791,53.498) R108.1@141.963,52.67 ; R108.1@141.62,52.327 141.62,54.517 142.65,55.547 ; K4.4@143.023,55.547 142.65,55.547 ; K4.4@143.236,55.162 ccw(c142.65,54.909) 142.65,55.547 ; K4.4@143.273,55.913 cw(c142.65,56.26) 142.65,55.547 ; K4.4@144.016,55.547 K4.4@144.05,55.547 ; Q20.2@144.093,16.523 ccw(c143.864,17.11) 144.494,17.11 ; Q20.2@144.202,16.243 ccw(c144.035,16.671) Q20.2@144.494,16.671 ; Q19.2@144.462,4.997 144.462,6.06 ; Q20.2@144.494,16.047 144.494,17.11 ; 144.597,6.195 ccw(c143.552,7.24) R59.1@145.03,7.24 ; 144.629,17.245 ccw(c143.584,18.29) R60.1@145.062,18.29 ; Q19.2@144.804,5.564 cw(c144.992,6.06) 144.462,6.06 ; 144.904,6.502 cw(c145.515,5.891) R59.1@145.515,6.755 ; 144.936,17.552 cw(c145.547,16.941) R60.1@145.547,17.805 ; R59.1@145.109,6.707 ccw(c144.577,7.24) R59.1@145.33,7.24 ; R60.1@145.141,17.757 ccw(c144.609,18.29) R60.1@145.362,18.29 ; R60.1@145.801,18.775 ccw(c145.801,19.639) 146.412,19.028 ; R59.1@145.9,7.109 cw(c146.505,6.504) 146.505,7.36 ; R59.1@146.112,6.897 cw(c147.23,5.779) v1@147.23,7.36 ; R59.1@146.112,7.583 ccw(c146.65,8.121) 146.65,7.36 ; R60.1@146.278,18.376 cw(c147.116,18.528) 146.514,19.13 ; v1@147.306,7.254 ccw(c147.05,6.998) 147.05,7.36 ccw(c147.05,7.722) v1@147.306,7.466 ; R106.1@147.326,52.67 ccw(c146.498,53.498) 147.669,53.498 ccw(c148.84,53.498) R106.1@148.012,52.67 ; v1@147.338,19.024 ccw(c147.082,18.768) 147.082,19.13 ccw(c147.082,19.492) v1@147.338,19.236 ; v1(147.412,7.36) 145.762,7.36 144.462,6.06 ; v1(147.444,19.13) 146.514,19.13 ; R106.1@147.669,52.327 147.669,54.517 148.699,55.547 ; K2.4@149.289,55.16 ccw(c148.699,54.903) 148.699,55.547 ; K2.4@149.327,55.915 cw(c148.699,56.266) 148.699,55.547 ; K2.4@150.099,55.547 148.699,55.547 ; Q22.2@152.648,16.502 ccw(c152.305,17.11) 153.003,17.11 ; Q21.2@152.803,5.484 ccw(c152.382,5.905) 152.977,5.905 ; Q21.2@152.977,4.997 152.977,6.06 ; Q22.2@153.003,16.047 153.003,17.11 ; 153.112,6.195 ccw(c152.067,7.24) R61.1@153.545,7.24 ; 153.139,17.245 ccw(c152.094,18.29) R62.1@153.571,18.29 ; Q21.2@153.254,5.521 cw(c153.639,6.06) 152.977,6.06 ; R119.1@153.375,52.67 ccw(c152.547,53.498) 153.718,53.498 ccw(c154.889,53.498) R119.1@154.061,52.67 ; 153.419,6.502 cw(c154.03,5.891) R61.1@154.03,6.755 ; 153.445,17.552 cw(c154.056,16.941) R62.1@154.056,17.805 ; R61.1@153.624,6.707 ccw(c153.091,7.24) R61.1@153.845,7.24 ; R62.1@153.651,17.757 ccw(c153.118,18.29) R62.1@153.871,18.29 ; R119.1@153.718,52.327 153.718,54.517 154.748,55.547 ; R62.1@154.31,18.775 ccw(c154.31,19.639) 154.921,19.028 ; R61.1@154.414,7.109 cw(c155.02,6.504) 155.02,7.36 ; R61.1@154.627,6.897 cw(c155.744,5.779) v1@155.744,7.36 ; R61.1@154.627,7.583 ccw(c155.165,8.121) 155.165,7.36 ; R62.1@154.788,18.376 cw(c155.625,18.528) 155.023,19.13 ; K15.4@155.343,55.158 ccw(c154.748,54.897) 154.748,55.547 ; K15.4@155.381,55.917 cw(c154.748,56.273) 154.748,55.547 ; v1@155.821,7.254 ccw(c155.565,6.998) 155.565,7.36 ccw(c155.565,7.722) v1@155.821,7.466 ; v1@155.847,19.024 ccw(c155.591,18.768) 155.591,19.13 ccw(c155.591,19.492) v1@155.847,19.236 ; v1(155.927,7.36) 154.277,7.36 152.977,6.06 ; v1(155.953,19.13) 155.023,19.13 ; K15.4@156.148,55.547 154.748,55.547 ; R117.1@159.424,52.67 ccw(c158.596,53.498) 159.767,53.498 ccw(c160.938,53.498) R117.1@160.11,52.67 ; R117.1@159.767,52.327 159.767,54.517 160.797,55.547 ; Q23.2@161.188,5.542 ccw(c160.897,6.06) 161.491,6.06 ; Q24.2@161.198,16.475 ccw(c160.715,17.11) 161.513,17.11 ; K13.4@161.397,55.156 ccw(c160.797,54.891) 160.797,55.547 ; K13.4@161.434,55.919 cw(c160.797,56.279) 160.797,55.547 ; Q23.2@161.491,4.997 161.491,6.06 ; 161.491,5.765 ccw(c161.888,5.765) Q23.2@161.607,5.484 ; Q24.2@161.513,16.047 161.513,17.11 ; 161.513,16.794 ccw(c162.007,16.794) Q24.2@161.657,16.444 ; 161.627,6.195 ccw(c160.582,7.24) R63.1@162.059,7.24 ; 161.648,17.245 ccw(c160.603,18.29) R64.1@162.081,18.29 ; 161.933,6.502 cw(c162.544,5.891) R63.1@162.544,6.755 ; 161.955,17.552 cw(c162.566,16.941) R64.1@162.566,17.805 ; R63.1@162.139,6.707 ccw(c161.606,7.24) R63.1@162.359,7.24 ; R64.1@162.16,17.757 ccw(c161.627,18.29) R64.1@162.381,18.29 ; K13.4@162.197,55.547 160.797,55.547 ; R64.1@162.714,18.334 cw(c163.548,17.985) 163.548,18.89 ; R63.1@162.929,7.109 cw(c163.535,6.504) 163.535,7.36 ; R64.1@162.99,18.219 cw(c163.999,17.796) 163.999,18.89 ; R63.1@163.141,6.897 cw(c164.259,5.779) v1@164.259,7.36 ; R63.1@163.141,7.583 ccw(c163.68,8.121) 163.68,7.36 ; R64.1@163.267,18.103 cw(c164.45,17.608) v1(164.45,18.89) 163.293,18.89 161.513,17.11 ; v1@164.335,7.254 ccw(c164.079,6.998) 164.079,7.36 ccw(c164.079,7.722) v1@164.335,7.466 ; v1@164.344,18.784 ccw(c164.088,18.528) 164.088,18.89 ccw(c164.088,19.252) v1@164.344,18.996 ; v1(164.441,7.36) 162.791,7.36 161.491,6.06 ; R115.1@165.473,52.67 ccw(c164.645,53.498) 165.816,53.498 ccw(c166.987,53.498) R115.1@166.159,52.67 ; R115.1@165.816,52.327 165.816,54.517 166.846,55.547 ; K11.4@167.45,55.154 ccw(c166.846,54.886) 166.846,55.547 ; K11.4@167.488,55.92 cw(c166.846,56.286) 166.846,55.547 ; R6.1@167.559,33.079 cw(c166.746,32.26) 167.9,32.26 ; R6.1@167.9,33.551 167.9,32.26 ; v1@168.17,31.84 ccw(c167.808,31.84) 168.064,32.096 ccw(c168.32,32.352) v1@168.32,31.99 ; R6.1@168.241,33.079 ccw(c169.054,32.26) 167.9,32.26 ; K11.4@168.246,55.547 166.846,55.547 ; v1(168.32,31.84) 167.9,32.26 ; Q26.2@169.687,16.489 ccw(c169.279,17.11) 170.022,17.11 ; Q25.2@169.843,5.484 ccw(c169.448,5.879) 170.006,5.879 ; Q25.2@170.006,4.997 170.006,6.06 ; Q26.2@170.022,16.047 170.022,17.11 ; 170.022,16.699 ccw(c170.382,16.699) Q26.2@170.127,16.444 ; 170.141,6.195 ccw(c169.096,7.24) R81.1@170.574,7.24 ; 170.157,17.245 ccw(c169.112,18.29) R82.1@170.59,18.29 ; Q25.2@170.288,5.526 cw(c170.654,6.06) 170.006,6.06 ; 170.448,6.502 cw(c171.059,5.891) R81.1@171.059,6.755 ; 170.464,17.552 cw(c171.075,16.941) R82.1@171.075,17.805 ; R81.1@170.653,6.707 ccw(c170.121,7.24) R81.1@170.874,7.24 ; R82.1@170.669,17.757 ccw(c170.137,18.29) R82.1@170.89,18.29 ; R81.1@171.444,7.109 cw(c172.049,6.504) 172.049,7.36 ; R82.1@171.46,18.159 cw(c172.017,17.602) 172.017,18.39 ; R113.1@171.522,52.67 ccw(c170.694,53.498) 171.865,53.498 ccw(c173.035,53.498) R113.1@172.208,52.67 ; R81.1@171.656,6.897 cw(c172.774,5.779) v1@172.774,7.36 ; R81.1@171.656,7.583 ccw(c172.194,8.121) 172.194,7.36 ; R82.1@171.672,17.947 cw(c172.741,16.878) v1@172.741,18.39 ; R82.1@171.672,18.633 ccw(c172.258,19.219) 172.258,18.39 ; R113.1@171.865,52.327 171.865,54.517 172.895,55.547 ; v1@172.85,7.254 ccw(c172.594,6.998) 172.594,7.36 ccw(c172.594,7.722) v1@172.85,7.466 ; v1@172.874,18.284 ccw(c172.618,18.028) 172.618,18.39 ccw(c172.618,18.752) v1@172.874,18.496 ; v1(172.956,7.36) 171.306,7.36 170.006,6.06 ; v1(172.98,18.39) 171.302,18.39 170.022,17.11 ; K9.4@173.504,55.153 ccw(c172.895,54.88) 172.895,55.547 ; K9.4@173.542,55.922 cw(c172.895,56.292) 172.895,55.547 ; K9.4@174.295,55.547 172.895,55.547 ; R111.1@177.57,52.67 ccw(c176.743,53.498) 177.913,53.498 ccw(c179.084,53.498) R111.1@178.256,52.67 ; R111.1@177.913,52.327 177.913,54.517 178.943,55.547 K7.4@180.343,55.547 ; Q28.2@178.233,16.463 ccw(c177.681,17.11) 178.531,17.11 ; Q27.2@178.313,5.484 ccw(c177.81,5.987) 178.521,5.987 ; Q27.2@178.521,4.997 178.521,6.06 ; Q28.2@178.531,16.047 178.531,17.11 ; 178.531,16.87 ccw(c179.133,16.87) Q28.2@178.707,16.444 ; 178.656,6.195 ccw(c177.611,7.24) R83.1@179.089,7.24 ; 178.667,17.245 ccw(c177.622,18.29) R84.1@179.099,18.29 ; Q27.2@178.782,5.507 cw(c179.236,6.06) 178.521,6.06 ; 178.963,6.502 cw(c179.574,5.891) R83.1@179.574,6.755 ; 178.973,17.552 cw(c179.584,16.941) R84.1@179.584,17.805 ; R83.1@179.168,6.707 ccw(c178.635,7.24) R83.1@179.389,7.24 ; R84.1@179.179,17.757 ccw(c178.646,18.29) R84.1@179.399,18.29 ; K7.4@179.557,55.151 ccw(c178.943,54.874) 178.943,55.547 ccw(c178.943,56.299) K7.4@179.595,55.924 ; R83.1@179.958,7.109 cw(c180.564,6.504) 180.564,7.36 ; R84.1@179.969,18.159 cw(c180.575,17.554) 180.575,18.41 ; R83.1@180.171,6.897 cw(c181.288,5.779) v1@181.288,7.36 ; R83.1@180.171,7.583 ccw(c180.709,8.121) 180.709,7.36 ; R84.1@180.181,17.947 cw(c181.299,16.829) v1@181.299,18.41 ; R84.1@180.181,18.633 ccw(c180.72,19.171) 180.72,18.41 ; 181.05,18.41 cw(c181.05,17.98) v1@181.354,18.284 ; 181.146,18.41 ccw(c181.146,18.704) v1@181.354,18.496 ; v1@181.384,7.254 ccw(c181.128,6.998) 181.128,7.36 ccw(c181.128,7.722) v1@181.384,7.466 ; v1@181.46,18.41 179.831,18.41 178.531,17.11 ; v1(181.49,7.36) 179.821,7.36 178.521,6.06 ; R109.1@183.619,52.67 ccw(c182.791,53.498) 183.962,53.498 ccw(c185.133,53.498) R109.1@184.305,52.67 ; R109.1@183.962,52.327 183.962,54.517 184.992,55.547 ; K5.4@185.611,55.149 ccw(c184.992,54.868) 184.992,55.547 ; K5.4@185.649,55.926 cw(c184.992,56.306) 184.992,55.547 ; K5.4@186.392,55.547 184.992,55.547 ; Q29.2@186.923,5.484 ccw(c186.65,5.757) 187.035,5.757 ; Q30.2@186.923,16.444 ccw(c186.637,16.73) 187.041,16.73 ; Q29.2@187.035,4.997 187.035,6.06 ; Q30.2@187.041,16.047 187.041,17.11 ; 187.171,6.195 ccw(c186.126,7.24) R85.1@187.603,7.24 ; 187.176,17.245 ccw(c186.131,18.29) R86.1@187.609,18.29 ; Q29.2@187.34,5.543 cw(c187.627,6.06) 187.035,6.06 ; Q30.2@187.369,16.485 cw(c187.8,17.11) 187.041,17.11 ; 187.477,6.502 cw(c188.088,5.891) R85.1@188.088,6.755 ; 187.483,17.552 cw(c188.094,16.941) R86.1@188.094,17.805 ; R85.1@187.683,6.707 ccw(c187.15,7.24) R85.1@187.903,7.24 ; R86.1@187.688,17.757 ccw(c187.155,18.29) R86.1@187.909,18.29 ; R85.1@188.342,7.725 ccw(c188.342,8.589) 188.953,7.978 ; R86.1@188.348,18.775 ccw(c188.348,19.639) 188.959,19.028 ; R85.1@188.82,7.326 cw(c189.657,7.478) 189.055,8.08 ; R86.1@188.825,18.376 cw(c189.663,18.528) 189.061,19.13 ; R107.1@189.668,52.67 ccw(c188.84,53.498) 190.011,53.498 ccw(c191.182,53.498) R107.1@190.354,52.67 ; v1@189.879,7.974 ccw(c189.623,7.718) 189.623,8.08 ccw(c189.623,8.442) v1@189.879,8.186 ; v1@189.885,19.024 ccw(c189.629,18.768) 189.629,19.13 ccw(c189.629,19.492) v1@189.885,19.236 ; v1(189.985,8.08) 189.055,8.08 ; v1(189.991,19.13) 189.061,19.13 ; R107.1@190.011,52.327 190.011,54.517 191.04,55.546 191.433,55.546 ; K3.4@191.664,55.147 ccw(c191.041,54.862) 191.041,55.547 ccw(c191.041,56.312) K3.4@191.703,55.927 ; K3.4@193.197,55.88 ccw(c193.737,56.15) 193.737,55.547 ccw(c193.737,55.007) K3.4@193.232,55.199 ; Q31.2@195.353,5.484 ccw(c194.876,5.961) 195.55,5.961 ; Q32.2@195.353,16.444 ccw(c194.876,16.921) 195.55,16.921 ; Q31.2@195.55,4.997 195.55,6.06 ; Q32.2@195.55,16.047 195.55,17.11 ; 195.685,6.195 ccw(c194.64,7.24) R87.1@196.118,7.24 ; 195.685,17.245 ccw(c194.64,18.29) R88.1@196.118,18.29 ; R105.1@195.717,52.623 ccw(c194.889,53.451) 196.06,53.451 ccw(c197.231,53.451) R105.1@196.403,52.623 ; Q31.2@195.816,5.512 cw(c196.247,6.06) 195.55,6.06 ; Q32.2@195.837,16.454 cw(c196.442,17.11) 195.55,17.11 ; 195.992,6.502 cw(c196.603,5.891) R87.1@196.603,6.755 ; 195.992,17.552 cw(c196.603,16.941) R88.1@196.603,17.805 ; R105.1@196.06,52.28 196.06,54.47 197.09,55.5 ; R87.1@196.197,6.707 ccw(c195.665,7.24) R87.1@196.418,7.24 ; R88.1@196.197,17.757 ccw(c195.665,18.29) R88.1@196.418,18.29 ; R87.1@196.857,7.725 ccw(c196.857,8.589) 197.468,7.978 ; R88.1@196.857,18.775 ccw(c196.857,19.639) 197.468,19.028 ; R87.1@197.334,7.326 cw(c198.172,7.478) 197.57,8.08 ; R88.1@197.334,18.376 cw(c198.172,18.528) 197.57,19.13 ; K1.4@197.736,55.108 ccw(c197.09,54.772) 197.09,55.5 ; K1.4@197.736,55.892 cw(c197.09,56.228) 197.09,55.5 ; v1@198.394,7.974 ccw(c198.138,7.718) 198.138,8.08 ccw(c198.138,8.442) v1@198.394,8.186 ; v1@198.394,19.024 ccw(c198.138,18.768) 198.138,19.13 ccw(c198.138,19.492) v1@198.394,19.236 ; K1.4@198.49,55.5 197.09,55.5 ; v1(198.5,8.08) 197.57,8.08 ; v1(198.5,19.13) 197.57,19.13 ; 67.83,6.06 69.85,8.08 ; 76.345,6.06 78.365,8.08 ; 76.419,17.11 78.439,19.13 ; 84.859,6.06 86.879,8.08 ; 84.929,17.11 86.949,19.13 ; 93.438,17.11 95.458,19.13 ; 101.889,6.06 103.909,8.08 ; 101.947,17.11 103.967,19.13 ; 110.403,6.06 112.423,8.08 ; 110.457,17.11 112.477,19.13 ; 118.918,6.06 120.938,8.08 ; 118.966,17.11 120.986,19.13 ; 127.433,6.06 129.453,8.08 ; 127.475,17.11 129.495,19.13 ; 135.947,6.06 137.967,8.08 ; 135.985,17.11 138.005,19.13 ; 144.494,17.11 146.514,19.13 ; 153.003,17.11 155.023,19.13 ; 187.035,6.06 189.055,8.08 ; 187.041,17.11 189.061,19.13 ; 195.55,6.06 197.57,8.08 ; 195.55,17.11 197.57,19.13
  Bottom Layer w0.4: 54.83,79.15 54.71,79.03 54.71,72.49 55.33,71.87 98.58,71.87 100.37,70.08 100.37,61.4 101.76,60.01 193.75,60.01 194.61,59.15 194.61,56.42 193.737,55.547 191.434,55.547 191.433,55.546 ; 105.134,60.01 105.454,59.69 ; 105.774,60.01 105.454,59.69 ; 105.927,56.327 ccw(c106.694,57.094) K16.4@107.273,56.177 ; 106.281,55.973 ccw(c106.968,56.66) K16.4@107.487,55.838 ; 106.635,55.619 ccw(c107.242,56.226) K16.4@107.7,55.5 106.754,55.5 105.454,56.8 105.454,59.69 ; 111.187,60.01 111.507,59.69 ; 111.827,60.01 111.507,59.69 ; 111.98,56.327 ccw(c112.747,57.094) K14.4@113.326,56.177 ; 112.334,55.973 ccw(c113.021,56.66) K14.4@113.539,55.838 ; 112.688,55.619 ccw(c113.295,56.226) K14.4@113.753,55.5 112.807,55.5 111.507,56.8 111.507,59.69 ; 117.239,60.01 117.559,59.69 ; 117.879,60.01 117.559,59.69 ; 118.032,56.327 ccw(c118.8,57.094) K12.4@119.378,56.177 ; 118.386,55.973 ccw(c119.073,56.66) K12.4@119.592,55.838 ; 118.74,55.619 ccw(c119.347,56.226) K12.4@119.805,55.5 118.859,55.5 117.559,56.8 117.559,59.69 ; 120.42,46.71 ccw(c120.773,46.71) U10.10@120.523,46.461 ; 120.42,47.676 ccw(c121.738,47.676) U10.10@120.806,46.744 ; v1(120.42,48.37) 120.42,46.141 U10.10@120.75,45.811 ; 123.292,60.01 123.612,59.69 ; 123.932,60.01 123.612,59.69 ; 124.085,56.327 ccw(c124.852,57.094) K10.4@125.431,56.177 ; 124.439,55.973 ccw(c125.126,56.66) K10.4@125.645,55.838 ; 124.793,55.619 ccw(c125.4,56.226) K10.4@125.858,55.5 124.912,55.5 123.612,56.8 123.612,59.69 ; 129.345,60.01 129.665,59.69 ; 129.985,60.01 129.665,59.69 ; 130.138,56.327 ccw(c130.905,57.094) K8.4@131.484,56.177 ; 130.492,55.973 ccw(c131.179,56.66) K8.4@131.697,55.838 ; 130.846,55.619 ccw(c131.453,56.226) K8.4@131.911,55.5 130.965,55.5 129.665,56.8 129.665,59.69 ; 135.397,60.01 135.717,59.69 ; 136.037,60.01 135.717,59.69 ; 136.19,56.327 ccw(c136.958,57.094) K6.4@137.536,56.177 ; 136.544,55.973 ccw(c137.231,56.66) K6.4@137.75,55.838 ; 136.898,55.619 ccw(c137.505,56.226) K6.4@137.963,55.5 137.017,55.5 135.717,56.8 135.717,59.69 ; v1(140.92,46.19) 141.5,46.19 U8.10@141.77,45.92 ; 141.45,60.01 141.77,59.69 ; 142.09,60.01 141.77,59.69 ; 142.243,56.327 ccw(c143.01,57.094) K4.4@143.589,56.177 ; 142.597,55.973 ccw(c143.284,56.66) K4.4@143.803,55.838 ; 142.951,55.619 ccw(c143.558,56.226) K4.4@144.016,55.5 143.07,55.5 141.77,56.8 141.77,59.69 ; K2.4@150.069,55.5 150.674,55.5 152.154,56.98 ; K2.4@150.117,55.897 ccw(c150.33,57.643) 151.573,56.399 ; K2.4@150.165,56.294 ccw(c150.456,58.678) 152.154,56.98 ; 151.894,60.01 152.154,59.75 ; 152.414,60.01 152.154,59.75 ; K15.4@156.121,55.5 156.727,55.5 158.207,56.98 ; K15.4@156.17,55.897 ccw(c156.382,57.643) 157.626,56.399 ; K15.4@156.218,56.294 ccw(c156.508,58.678) 158.207,56.98 ; 157.947,60.01 158.207,59.75 ; 158.467,60.01 158.207,59.75 ; K13.4@162.174,55.5 162.779,55.5 164.259,56.98 ; K13.4@162.222,55.897 ccw(c162.435,57.643) 163.679,56.399 ; K13.4@162.271,56.294 ccw(c162.561,58.678) 164.259,56.98 ; 163.999,60.01 164.259,59.75 ; 164.519,60.01 164.259,59.75 ; K11.4@168.227,55.5 168.832,55.5 170.312,56.98 ; K11.4@168.275,55.897 ccw(c168.488,57.643) 169.731,56.399 ; K11.4@168.323,56.294 ccw(c168.614,58.678) 170.312,56.98 ; 170.052,60.01 170.312,59.75 ; 170.572,60.01 170.312,59.75 ; K9.4@174.279,55.5 174.885,55.5 176.365,56.98 ; K9.4@174.328,55.897 ccw(c174.54,57.643) 175.784,56.399 ; K9.4@174.376,56.294 ccw(c174.666,58.678) 176.365,56.98 ; 176.105,60.01 176.365,59.75 ; 176.625,60.01 176.365,59.75 ; K7.4@180.332,55.5 180.937,55.5 182.417,56.98 ; K7.4@180.38,55.897 ccw(c180.593,57.643) 181.837,56.399 ; K7.4@180.429,56.294 ccw(c180.719,58.678) 182.417,56.98 ; 182.157,60.01 182.417,59.75 ; 182.677,60.01 182.417,59.75 ; K5.4@186.385,55.5 186.99,55.5 188.47,56.98 ; K5.4@186.433,55.897 ccw(c186.646,57.643) 187.889,56.399 ; K5.4@186.481,56.294 ccw(c186.772,58.678) 188.47,56.98 ; 188.21,60.01 188.47,59.75 ; 188.73,60.01 188.47,59.75 ; 152.154,56.98 152.154,59.75 ; 158.207,56.98 158.207,59.75 ; 164.259,56.98 164.259,59.75 ; 170.312,56.98 170.312,59.75 ; 176.365,56.98 176.365,59.75 ; 182.417,56.98 182.417,59.75 ; 188.47,56.98 188.47,59.75
  other v1: 181.46,18.39 53.1,80.15 53.735,80.15 54.37,80.15 53.1,80.76 53.735,80.76 54.37,80.76
VDD_3V3: P1.3 P1.4 | length 5.2
  Top Layer w0.8: P1.4@48.073,25.997 ccw(c47.475,26.595) 48.32,26.595 ccw(c49.165,26.595) P1.4@48.567,25.997 ; P1.3@48.073,28.043 cw(c47.475,27.445) 48.32,27.445 cw(c49.165,27.445) P1.3@48.567,28.043 ; P1.4@48.32,25.75 P1.3@48.32,28.29
VDD_5V: C93.1 C94.2 C96.1 CA2.1 L5.2 P1.5 P1.6 R156.2 U9.1 U22.3 | length 100.7
  Top Layer w0.5: R156.2@41.166,76.9 42.28,75.786 v1(42.28,75.11) ; R156.2@41.293,76.515 cw(c41.293,75.892) R156.2@41.733,76.333 ; R156.2@41.678,76.9 ccw(c42.914,76.9) 42.04,76.026 ; U9.1@44.446,20.924 ccw(c43.593,21.777) 44.8,21.777 ccw(c46.007,21.777) U9.1@45.154,20.924 ; U9.1@44.8,20.57 44.8,22.09 45.78,23.07 49.91,23.07 50.86,24.02 P1.5@50.86,28.29 ; P1.6@50.506,25.396 cw(c49.653,24.543) 50.86,24.543 cw(c52.067,24.543) P1.6@51.214,25.396 ; P1.6@50.506,26.104 ccw(c49.653,26.957) 50.86,26.957 ccw(c52.067,26.957) P1.6@51.214,26.104 ; P1.5@50.506,27.936 cw(c49.653,27.083) 50.86,27.083 cw(c52.067,27.083) P1.5@51.214,27.936
  MidLayer2 w0.5: P1.5@50.86,28.29 P1.5@50.875,28.305
  Bottom Layer w0.5: C94.2@32.416,61.66 32.646,61.43 42.36,61.43 43.54,62.61 43.54,73.85 v1(42.28,75.11) ; C94.2@32.815,61.932 ccw(c34.028,63.145) 34.028,61.43 ; C96.1@32.93,56.84 33.49,56.28 49.947,56.28 51.08,55.147 51.08,43.403 52.683,41.8 52.683,31.081 50.86,29.258 P1.5@50.86,28.29 ; C96.1@32.976,56.759 ccw(c34.131,57.914) 34.131,56.28 ; C96.1@33.329,57.112 ccw(c35.338,59.121) 35.338,56.28
  other v1: 35.75,56.262 35.75,56.981 35.75,57.7 36.19,61.43
VDD_ADC: P1.32
VIN_D: Q33.5 Q33.6 Q33.7 Q33.8 Q33.9 R149.2 U21.1 | length 23.9
  Top Layer w0.3: R149.2@38.816,84.209 ccw(c38.098,84.927) 39.114,84.927 ; 39.114,85.197 ccw(c40.512,85.197) R149.2@39.524,84.209 ; U21.1@39.114,88.71 39.114,83.636 R149.2@39.17,83.58
  Top Layer w1: Q33.5@32.78,83.09 36.488,83.09 37.034,83.636 ; Q33.9@35.258,85.505 ccw(c37.77,86.259) 37.77,83.636 ; Q33.9@36.1,84.57 37.034,83.636 ; Q33.9@36.215,85.792 ccw(c39.114,86.662) R149.2@39.114,83.636 ; Q33.9@36.285,85.319 ccw(c38.539,85.319) 36.945,83.725 ; R149.2@39.114,83.636 37.034,83.636
pads on no net: J1.1 J1.3 J1.4 J1.5 J1.6 J1.8 J1.9 J2.1 J2.4 J2.6 J2.9 U1.10 U2.1 U3.1 U3.2 U3.16 U3.27 U4.1 U4.2 U4.16 U5.1 U5.2 U5.16 U6.1 U6.2 U6.16 U7.1 U11.4 U11.5 U11.11 U11.14 U14.3 U14.4 U14.5 U14.6 U14.8 U14.9 U14.10 U14.12 U14.13 U14.14 U14.17 U14.20 U14.21 U14.22 U14.23 U14.24 U14.25 U14.26 U14.27 U14.28 U14.29 U15.3 U15.20 U16.3 U16.20 U17.2 U17.6 U17.8 U17.10 U17.12 U17.17 U17.18 U17.19 U18.7 U19.2 U19.3 U23.2 U23.3 U23.5
copper on no net:
  other v2: 34.425,40.14 35.425,40.14 36.425,40.14 34.425,41.14 35.425,41.14 36.425,41.14 34.425,42.14 35.425,42.14 36.425,42.14

## Polygon pours and split planes (outlines as drawn)
DGND on Top Layer "Top Layer-No Net 1" (solid, pour order 1006): 47.39,50.18 39.98,50.18 39.6,49.8 39.6,47.25 40.01,46.84 47.53,46.84 48.01,47.32 48.01,49.56 47.39,50.18
DGND on Top Layer "Top Layer-No Net 1" (solid, pour order 1005): 30.67,54.5 30.67,58 29.58,59.09 29.58,64.27 30.41,65.1 30.41,68.87 29.61,69.67 26.54,69.67 25.94,69.07 25.94,59.21 27.48,57.67 27.48,54.79 28.05,54.22 30.39,54.22
DGND on Top Layer "Top Layer-No Net 1" (solid, pour order 1004): 28.76,73.2 33.12,73.2 33.26,73.34 33.26,75.38 33.56,75.68 34.05,75.68 34.46,76.09 34.46,80.51 34.17,80.8 30.13,80.8 29.14,79.81 29.14,77.61 28.56,77.03 28.56,73.4 28.76,73.2
VDD_5V on Top Layer "Top Layer-No Net 1" (solid, pour order 1003): 32.42,62.72 32.42,55.25 32.88,54.79 38.09,54.79 39.29,53.59 43.01,53.59 43.97,54.55 43.97,62.1 43.35,62.72
NetC91_2 on Top Layer "Top Layer-No Net 1" (solid, pour order 1002): 36.44,70.67 34.24,70.67 32.47,68.9 32.47,64.94 32.87,64.54 46.54,64.54 47.26,65.26 47.26,70.73 46.75,71.24 45.15,71.24 45.04,71.13 45.04,69.2 44.61,68.77 37.44,68.77 36.61,69.6 36.61,70.5
VCC24V on Top Layer "Top Layer-No Net 1" (solid, pour order 1001): 56.53,88.94 53.1,88.94 52.58,88.42 52.58,79.57 53.36,78.79 57.11,78.79 57.45,79.13 57.45,88.02 56.53,88.94
DGND on Top Layer "Top Layer-No Net 1" (solid, pour order 1000): 58.75,88.93 58.75,79.93 59.96,78.72 83.05,78.72 83.77,79.44 83.77,83.52 83.02,84.27 63.81,84.27 62.51,85.57 62.51,88.27 61.63,89.15 58.97,89.15
V3_3D on Top Layer "Top Layer-No Net 1" (solid, pour order 1000): 44.81,52.37 49.77,52.37 50,52.6 50,55.99 49.75,56.24 44.71,56.24 44.47,56 44.47,52.71
DGND on MidLayer1 "Top Layer-No Net 1" (solid, remove dead copper, pour order 1002): 37.777,1.507 37.777,23.973 42.653,28.849 50.571,28.849 54.237,32.515 56.85,35.128 65.509,35.128 70.697,35.128 71.828,36.259 71.828,42.188 73.154,43.514 86.689,43.514 89.419,46.244 89.419,99.485 91.096,101.162 223.536,101.162 225.712,98.986 225.712,70.97 224.016,69.274 215.787,69.274 213.651,67.138 212.206,65.693 210.07,65.693 197.695,65.693 195.685,63.683 195.685,59.664 196.942,58.407 198.733,58.407 199.664,57.476 199.664,49.675 201.05,48.289 201.05,46.71 200.695,46.355 182.45,46.355 181.635,45.54 181.635,26.379 183.193,24.821 225.338,24.821 226.376,23.783 226.376,1.365 225.668,0.657 38.627,0.657 37.777,1.507